# Altium PCB dctr_v2.0.pcbDoc
Units mil, origin at the board's own origin, x right, y up, seen from the top; angles counter-clockwise.
Board outline 7322.83 x 1023.62 mil, 2 copper layers (Top Layer, Bottom Layer); 19 components, 20 nets, 83 pads, 18 vias.
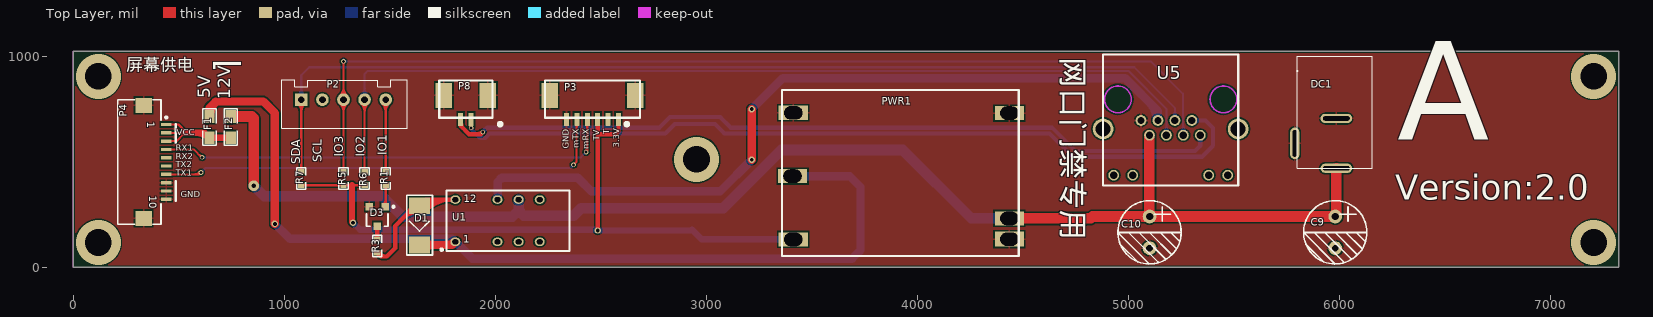
[diagram p0: Top Layer view]
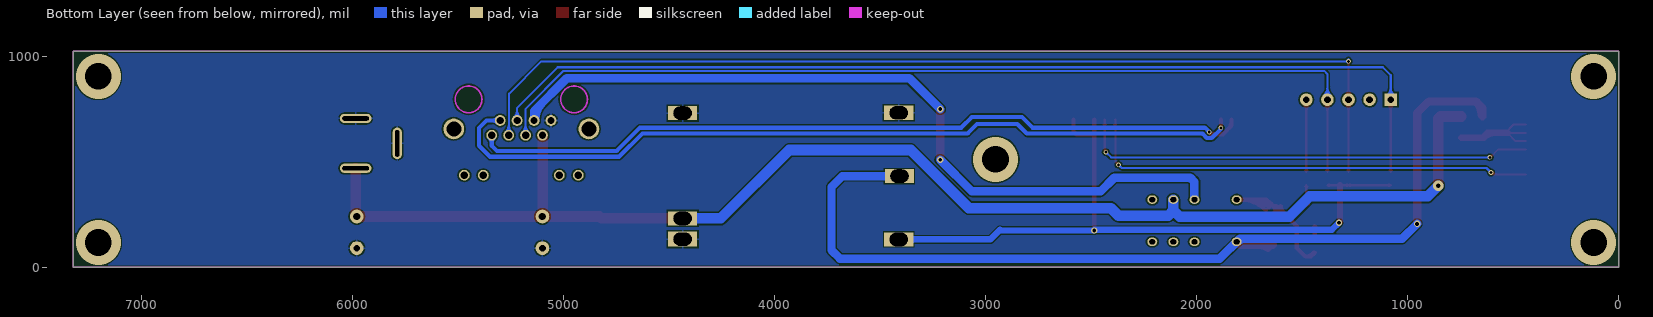
[diagram p1: Bottom Layer view, seen from below]

## Layer stack, top to bottom
Top Layer: signal copper 1.4
Dielectric: core 12.6, FR-4, Dk 4.8
Bottom Layer: signal copper 1.4

## Board outline
0,0 7322.83,0 7322.83,1023.62 0,1023.62

## Design rules (kind name [scope] priority, off if disabled: settings)
Clearance [All] p1: gap=7
ComponentClearance [All] p1: gap=0 collisioncheckmode=3 verticalgap=0 showdistances=FALSE
HoleSize [All] p1: absolutevalues=TRUE maxlimit=1000 minlimit=1 maxpercent=80.000 minpercent=20.000
HoleToHoleClearance [All] p1: gap=7 allowstackedmicrovias=TRUE
MinimumSolderMaskSliver [All] p1: minsoldermaskwidth=0
PolygonConnect [All] p1: connectstyle=Relief reliefconductorwidth=10 reliefentries=4 polygonreliefangle="90 Angle"
RoomDefinition IO [InComponentClass('IO')] p1: confinementstyle=ConfineIn formatcopy=TRUE lockcomponents=FALSE outline -12707.68,-5560.81 -10707.68,-5560.81 -10707.68,-4560.81 -12707.68,-4560.81
RoutingVias [All] p1: holewidth=14 width=22 viastyle="Through Hole" minholewidth=14 minwidth=22 maxholewidth=280 maxwidth=500
SilkToSilkClearance [All] p1: silktosilkclearance=0
SilkscreenOverComponentPads [All] p1: minsilkscreentomaskgap=0
SolderMaskExpansion [All] p1: expansion=4
TestPointUsage [All] p1: valid=0 allowmultiple=FALSE
Testpoint [All] p1: side=15 testpointundercomponent=TRUE minsize=40 maxsize=100 preferedsize=60 minholesize=0 maxholesize=40 preferedholesize=32 testpointgrid=1 style=1023 order=0123456789
Width [All] p1: maxlimit=100 minlimit=7 preferedwidth=7
18 further rules are at their usual default settings.

## Components (designator, comment, footprint, x,y, rotation, side; value= is the part's Value field where it differs from the comment)
C9 "220uF" RB.15/.3 5980,241.26 r90 top
C10 "220uF" RB.15/.3 5100,241.26 r90 top
D1 "D-S" DO-214AC(SMA) 1580,341.26 r270 top
D3 "AO3400A" SOT23A 1440,241.26 r180 top
DC1 "DC" DC005 5800,1001.26 r270 top
F1 "FUSE" 0805F 645,665.12 r270 top
F2 "FUSE" 0805F 745,665.12 r270 top
P2 "Header 5" XH2.54-5 1280,794.8 r0 top
P3 "Header 8" FPC/1.25T-6P 2460,701.26 r180 top
P4 "Header 12" FFC/SM1.0-2H10 440,500 r270 top
P8 "Header 4" FPC/1.25T-2P 1860,701.26 r180 top
PWR1 "PWR-1" PWR-1 4480,841.26 r180 top locked
R1 "10K" 0603R 1480,421.26 r90 top
R3 "10K" 0603R 1440,101.26 r90 top
R5 "10K" 0603R 1280,421.26 r270 top
R6 "10K" 0603R 1380,421.26 r270 top
R7 "10K" 0603R 1080,421.26 r270 top
U1 "JDQ(G6S-2)" JDQ-G6S-2 2060,221.26 r0 top
U5 "RJ45-DTE" RJ45-2 5200,661.26 r0 top

## Footprints (in the part's own frame and the unit in brackets; to place one, negate y for a bottom-side part, rotate by r counter-clockwise, add the part's x,y. Pads: shape width x height; smd on the part's side, far side on the other; paste and mask are expansions set on the pad)
0603R [mil]
  rect 25x30 smd: 1(-32,0) 2(32,0)
  silkscreen extent -51,-22 51,22
0805F [mil]
  rect 60x49.21 smd: 1(-50,0) 2(50,0)
  silkscreen extent -87,-31 86,31
DC005 [mm] "9*13.5*10( 外径5.5mm 内径2.1mm)"
  oval 1.1x3.8 hole 0.5 slot 3.2 at 90 deg: 1(13.5,4.7) 2(7.5,4.7)
  oval 3.8x1.1 hole 0.5 slot 3.2 at 0 deg: 3(10.5,-0.3)
  silkscreen extent 0,0 13.5,9
DO-214AC(SMA) [mm]
  rect 2x2.5 smd: A(1.27,1.524) K(5.969,1.524)
  silkscreen extent 0,0 7.19,3.1
FFC/SM1.0-2H10 [mm] "Connector; FH12 Series; 6 Position; 1.0mm Spaced Bottom Eccentric Contact"
  rect 0.4x1.25 smd: 1(-4.5,0) 2(-3.5,0) 3(-2.5,0) 4(-1.5,0) 5(-0.5,0) 6(0.5,0) 7(1.5,0) 8(2.5,0) 9(3.5,0) 10(4.5,0)
  rect 1.8x2 smd: 11(-6.8,-2.725) 12(6.8,-2.725)
  silkscreen extent -7.5,-5.82 7.5,0.13
FPC/1.25T-2P [mm]
  rect 0.6x1.6 smd: 1(-0.625,0) 2(0.625,0)
  rect 2x3 smd: 3(-2.65,-2.9) 4(2.65,-2.9)
  silkscreen extent -4.28,-4.7 3.2,0.71
FPC/1.25T-6P [mm]
  rect 0.6x1.6 smd: 1(-3.125,0) 2(-1.875,0) 3(-0.625,0) 4(0.625,0) 5(1.875,0) 6(3.125,0)
  rect 2x3 smd: 7(-5.15,-2.9) 8(5.15,-2.9)
  silkscreen extent -5.7,-4.7 5.7,0.71
JDQ-G6S-2 [mm] "继电器（G6S-2） 5VDC"
  oval 1.2x1 hole 0.6 slot 0.7 at 0 deg: 1(-6.35,-2.54) 3(-1.27,-2.54) 4(1.27,-2.54) 5(3.81,-2.54) 8(3.81,2.54) 9(1.27,2.54) 10(-1.27,2.54) 12(-6.35,2.54)
  silkscreen extent -8.14,-3.65 7.4,3.65
PWR-1 [mm]
  rect 3.5x1.8 hole 1.6 slot 2.2 at 0 deg: 1(1.125,17.975)
  rect 3.5x1.7 hole 1.6 slot 2.2 at 0 deg: 2(1.125,15.475) 3(1.125,2.8) 4(27.141,2.76) 5(27.225,10.38) 6(27.141,18)
  silkscreen extent 0,0 28.5,20
RB.15/.3 [mil] "8x11x3.5mm"
  round 65 hole 35: 1(0,0)
  round 65 hole 32: 2(-150,0)
  silkscreen extent -225,-150 75,150
RJ45-2 [mm] "FC601-56S-LED"
  round 2.5 hole 1.8: 0(-8.13,-0.13) 0(8.13,-0.13)
  round 1.3 hole 0.89: 1(-3.57,0.89) 2(-2.55,-0.89) 3(-1.53,0.89) 4(-0.51,-0.89) 5(0.51,0.89) 6(1.53,-0.89) 7(2.55,0.89) 8(3.57,-0.89) 9(-6.86,-5.7) 10(-4.57,-5.7) 11(4.57,-5.7) 12(6.86,-5.7)
  Keep-Out Layer circle w0.203: c-6.35,3.43 r1.61
  Keep-Out Layer circle w0.203: c6.35,3.43 r1.61
  silkscreen extent -8.13,-6.92 8.13,8.83
SOT23A [mm] "SOT-23; 3 Leads; Body 3.0 x 2.5 mm, inc. leads (LxW max)"
  rect 0.9x0.95 smd: 1(-0.95,-1.175) 2(0.95,-1.175) 3(0,1.175)
  silkscreen extent -2.07,-1.3 1.3,1.18
XH2.54-5 [mil]
  rect 60x60 hole 32: 1(-200,0)
  round 60 hole 32: 2(-100,0) 3(0,0) 4(100,0) 5(200,0)
  silkscreen extent -292,-136 301,94

## Part data
C9 C10: library part CAP-E, "电解电容"
D1: "肖特基二极管"
D3: library part MOS-N, "NMOS"
DC1: library part DC00X, "圆形电源接口"
F1 F2: "CR-1812-050A60V"
P2: "Header, 5-Pin"
P3: "Header, 8-Pin"
P4: "Header, 12-Pin"
P8: "Header, 4-Pin"
R1 R3 R5 R6 R7: library part RES, "普通电阻"
U1: "继电器（G6S-2 5VDC）"
U5: "设备"

## Via types
v1: diameter 22, hole 14, Top Layer to Bottom Layer, tented both sides, 7 vias
v2: diameter 212.6, hole 125.98, Top Layer to Bottom Layer, 5 vias
v3: diameter 30, hole 18, Top Layer to Bottom Layer, tented both sides, 3 vias
v4: diameter 30, hole 18, Top Layer to Bottom Layer, 2 vias
v5: diameter 50, hole 22, Top Layer to Bottom Layer, tented both sides, 1 vias

## Nets (pads, with @x,y where several pads share a name; then routed paths per layer and width w, separated by ;. In a path a pad name is that pad's centre, name@x,y a point inside that pad or via, vN(x,y) a via of type N, cw(c..) or ccw(c..) an arc to the next point about the centre after c; other vN are vias at no path point)
BTN: P2.3 R5.1 U5.6 | length 5258.9
  Top Layer w10: P2.3@1262.32,777.12 cw(c1219.64,734.44) 1280,734.44 cw(c1340.36,734.44) P2.3@1297.68,777.12 ; P2.3@1262.32,812.48 ccw(c1219.64,855.15) 1280,855.15 ccw(c1340.36,855.15) P2.3@1297.68,812.48 ; P2.3@1269.39,784.19 cw(c1243.79,758.59) 1280,758.59 cw(c1316.21,758.59) P2.3@1290.61,784.19 ; P2.3@1269.39,805.41 ccw(c1243.79,831.01) 1280,831.01 ccw(c1316.21,831.01) P2.3@1290.61,805.41 ; R5.1@1274.7,458.56 ccw(c1261.89,471.37) 1280,471.37 ccw(c1298.11,471.37) R5.1@1285.3,458.56 ; v1@1275.76,972.02 cw(c1265.51,961.77) 1280,961.77 cw(c1294.49,961.77) v1@1284.24,972.02 ; R5.1 P2.3 v1(1280,976.26)
  Bottom Layer w10: v1(1280,976.26) 1280,986.26 1290,976.26 5105,976.26 5257.67,823.59 5257.67,628.79 U5.6 ; v1@1284.24,972.02 cw(c1294.49,961.77) 1294.49,976.26 cw(c1294.49,990.75) v1@1284.24,980.5 ; U5.6@5245.68,640.78 ccw(c5216.72,669.73) 5257.67,669.73 ; 5257.67,657.99 ccw(c5292,657.99) U5.6@5267.72,633.71 ; 5257.67,682.13 ccw(c5316.14,682.13) U5.6@5274.8,640.78
D3V3: P3.1 P3.3 PWR1.6 R5.2 R6.2 R7.2 | length 3464.7
  Top Layer w10: R7.2 R5.2 1320,389.26 R6.2 ; R7.2@1087.8,383.96 cw(c1100.61,371.15) 1100.61,389.26 cw(c1100.61,407.37) R7.2@1087.8,394.56 ; R5.2@1272.2,383.96 ccw(c1259.39,371.15) 1259.39,389.26 ccw(c1259.39,407.37) R5.2@1272.2,394.56 ; R5.2@1287.8,383.96 cw(c1300.61,371.15) 1300.61,389.26 cw(c1300.61,407.37) R5.2@1287.8,394.56 ; R6.2@1372.2,383.96 ccw(c1359.39,371.15) 1359.39,389.26 ccw(c1359.39,407.37) R6.2@1372.2,394.56
  Top Layer w20: v4@2484.61,175.39 2484.61,631.26 ; P3.3 2484.61,631.26 ; P3.1 2583.03,644.29 2570,631.26 2484.61,631.26
  Top Layer w30: v3@1320,216.26 1320,389.26
  Bottom Layer w20: 2928.83,175 2931.47,177.64
  Bottom Layer w30: v3(1325,211.26) 1358.62,177.64 2485,177.64 2487.64,175 2928.83,175 ; 2931.47,177.64 2976.51,132.6 PWR1.6 ; PWR1.6@3362.98,119.54 ccw(c3331.46,88.02) 3331.46,132.6 ccw(c3331.46,177.18) PWR1.6@3362.98,145.65
  other v4: 2485,175
D5V: D1.K F1.1 PWR1.5 U1.1 | length 4814
  Top Layer w40: F1.1 645,756.26 675,786.26 ; F1.1@649.6,720.73 cw(c736.53,724.72) 675,786.26 ; v3(955,206.26) 955,731.26 900,786.26 675,786.26 ; D1.K 1795,106.26 U1.1 ; D1.K@1663.54,92.56 cw(c1696.61,59.5) 1696.61,106.26 cw(c1696.61,153.02) D1.K@1663.54,119.96 ; 1770.61,106.26 ccw(c1770.61,156.71) U1.1@1806.29,121.04
  Bottom Layer w40: v3(955,206.26) 1025.62,135.64 1795.62,135.64 1890,41.26 3690,41.26 3730,81.26 3730,381.26 3678.66,432.6 PWR1.5 ; 1772.11,135.64 cw(c1772.11,87.31) U1.1@1806.29,121.48
D12V: C9.1 C10.1 DC1.1 F2.1 PWR1.2 U1.9 U5.2 | length 6575.5
  Top Layer w50: F2.1 846.14,715.12 855,706.26 v5(855,386.26) ; PWR1.2 4820.75,232.01 4830,241.26 C10.1 C9.1 5985.04,246.3 DC1.1 ; C10.1@5099.61,241.65 U5.2
  Bottom Layer w50: v5(855,386.26) 905,336.26 1463.74,336.26 1560,240 2080,240 2110,270 ; U1.9 2110,270 ; PWR1.2 4254.25,232.01 3930,556.26 3355,556.26 3080,281.26 2406.26,281.26 2370,245 2135,245 2110,270
FEED1: P2.4 R6.1 U5.4 | length 4878.7
  Top Layer w10: P2.4@1362.32,777.12 cw(c1319.64,734.44) 1380,734.44 cw(c1440.36,734.44) P2.4@1397.68,777.12 ; P2.4@1369.39,784.19 cw(c1343.79,758.59) 1380,758.59 cw(c1416.21,758.59) P2.4@1390.61,784.19 ; R6.1@1374.7,458.56 ccw(c1361.89,471.37) 1380,471.37 ccw(c1398.11,471.37) R6.1@1385.3,458.56 ; R6.1 P2.4
  Bottom Layer w10: P2.4@1362.32,812.48 ccw(c1319.64,855.15) 1380,855.15 ccw(c1440.36,855.15) P2.4@1397.68,812.48 ; P2.4@1369.39,805.41 ccw(c1343.79,831.01) 1380,831.01 ccw(c1416.21,831.01) P2.4@1390.61,805.41 ; P2.4 1380,916.26 1395,931.26 5000,931.26 5179.92,751.34 U5.4 ; U5.4@5165.36,640.78 ccw(c5130.21,675.93) 5179.92,675.93 ccw(c5229.63,675.93) U5.4@5194.48,640.78
FEED2: P2.1 R7.1 U5.5 | length 5162.8
  Top Layer w10: P2.1@1062.32,777.12 cw(c1019.64,734.44) 1080,734.44 cw(c1140.36,734.44) P2.1@1097.68,777.12 ; P2.1@1069.39,784.19 cw(c1043.79,758.59) 1080,758.59 cw(c1116.21,758.59) P2.1@1090.61,784.19 ; R7.1@1074.7,458.56 ccw(c1061.89,471.37) 1080,471.37 ccw(c1098.11,471.37) R7.1@1085.3,458.56 ; R7.1 P2.1
  Bottom Layer w10: P2.1@1062.32,812.48 ccw(c1019.64,855.15) 1080,855.15 ccw(c1140.36,855.15) P2.1@1097.68,812.48 ; P2.1@1069.39,805.41 ccw(c1043.79,831.01) 1080,831.01 ccw(c1116.21,831.01) P2.1@1090.61,805.41 ; P2.1 1080,911.26 1117,948.26 5028,948.26 5220.08,756.18 U5.5 ; U5.5@5205.52,710.86 ccw(c5170.37,746.01) 5220.08,746.01 ccw(c5269.79,746.01) U5.5@5234.64,710.86
GND: C9.2 C10.2 D3.2 DC1.2 DC1.3 P3.6 P3.7 P3.8 P4.8 P4.9 P4.10 P4.11 P4.12 P8.3 P8.4 PWR1.1 PWR1.3 PWR1.4 U5.1
IO1: P2.5 R1.2 | length 521.7
  Top Layer w10: P2.5@1462.32,777.12 cw(c1419.64,734.44) 1480,734.44 cw(c1540.36,734.44) P2.5@1497.68,777.12 ; P2.5@1469.39,784.19 cw(c1443.79,758.59) 1480,758.59 cw(c1516.21,758.59) P2.5@1490.61,784.19 ; R1.2@1474.7,458.56 ccw(c1461.89,471.37) 1480,471.37 ccw(c1498.11,471.37) R1.2@1485.3,458.56 ; R1.2 P2.5
LOCK_V+: U1.10 U5.3 | length 3816.2
  Top Layer w40: v4(3215,510) v3(3215,750)
  Bottom Layer w40: U1.10 2010,405 2030,425 2390,425 2455,360 3065,360 v4(3215,510) ; v3(3215,750) 3361.26,896.26 4984.67,896.26 5139.76,741.17 U5.3 ; 5098.49,782.44 cw(c5012.35,696.3) U5.3@5134.17,696.3
NetD1_A: D1.A R3.1 U1.12 | length 1077.1
  Top Layer w20: R3.1 1458,51.26 1485,51.26 ; R3.1@1444.46,70.82 ccw(c1485,103.06) 1485,51.26 ; 1562.68,233.94 cw(c1630.16,166.46) D1.A@1630.16,261.89 ; 1587.2,258.46 ccw(c1554.4,291.26) D1.A@1600.79,291.26 ; D1.A@1596.82,268.08 cw(c1630.16,234.75) D1.A@1630.16,281.89 ; D1.A@1642.33,298.78 cw(c1696.61,244.5) 1696.61,321.26 ; D1.A@1656.47,284.63 cw(c1744.89,196.21) 1744.89,321.26 ; D1.A@1670.61,270.49 cw(c1793.17,147.93) U1.12@1793.17,321.26 ; U1.12@1799.21,314.41 ccw(c1782.68,297.88) 1782.68,321.26 ccw(c1782.68,344.64) U1.12@1799.21,328.11 ; U1.12 1670,321.26 D1.A 1620,291.26 1525,196.26 1525,91.26 1485,51.26
NetD3_1: D3.1 R1.1 | length 175.8
  Top Layer w10: D3.1@1468.41,297.5 ccw(c1440.43,325.48) 1480,325.48 ; R1.1@1474.7,383.96 cw(c1461.89,371.15) 1480,371.15 cw(c1498.11,371.15) R1.1@1485.3,383.96 ; D3.1@1480,290.12 R1.1 ; 1480,312.93 ccw(c1501.83,312.93) D3.1@1486.39,297.5
NetD3_3: D3.3 R3.2 | length 91
  Top Layer w20: D3.3@1434.54,188.56 cw(c1421.37,175.39) 1440,175.39 cw(c1458.63,175.39) D3.3@1445.46,188.56 ; R3.2 D3.3
NetF1_2: F1.2 F2.2 P4.1 P4.2 P4.3 | length 603.9
  Top Layer w10: P4.3 488.43,598.43 525.6,635.6 525.6,637.8 ; P4.2 525.6,637.8 ; P4.1 497.83,677.17 531.4,643.6 ; 537.2,637.8 531.4,643.6 ; 525.6,637.8 531.4,643.6
  Top Layer w30: 525.6,637.8 537.2,637.8 622.33,637.8 F1.2 F2.2 ; 580.09,637.8 cw(c580.09,555.6) F1.2@638.21,613.72
RX1: P3.4 P4.4 | length 2294
  Top Layer w10: P4.4 570.31,559.06 609.06,520.31 v1(610,521.26) ; 596.53,532.84 ccw(c610,546.31) v1@610,527.26 ; 601.09,528.28 cw(c594.08,521.26) v1@604,521.26 ; v1@2425.76,550.5 ccw(c2402.49,573.77) 2435.39,573.77 ; v1(2430,546.26) 2435.39,551.65 P3.4 ; P3.4@2430.58,676.76 cw(c2418.95,665.13) 2435.39,665.13 cw(c2451.84,665.13) P3.4@2440.21,676.76
  Bottom Layer w10: v1(610,521.26) 2405,521.26 v1(2430,546.26) ; v1@614.24,517.02 cw(c624.49,506.77) 624.49,521.26 cw(c624.49,535.75) v1@614.24,525.5 ; v1@2424,546.26 cw(c2409.51,546.26) 2419.76,536.02 cw(c2430,525.77) v1@2430,540.26
RX2: P4.5
SCL: P2.2
SPEAKERA: P8.1 U5.7 | length 3950.6
  Top Layer w20: P8.1 1884.61,661.46 1884.81,661.26 v1(1885,661.26)
  Bottom Layer w20: v1(1885,661.26) 1885,656.66 1928.4,613.26 1951.6,613.26 1968,629.66 1968,631.08 1972.03,635.11 2805.11,635.11 2850,680 3040,680 3084.89,635.11 4626.15,635.11 4737,524.26 5348,524.26 5400,576.26 5400,661.26 5364.96,696.3 U5.7 ; U5.7@5311.42,685.28 cw(c5338.03,658.66) 5338.03,696.3 cw(c5338.03,733.94) U5.7@5311.42,707.32
SPEAKERB: P8.2 U5.8 | length 3822.4
  Top Layer w20: P8.2@1835,700.87 1835,671.65 1875.39,631.26 1930,631.26 v1(1940,641.26) ; P8.2@1837.2,681.57 ccw(c1866.49,681.57) 1845.78,660.87 ; 1913.44,631.26 ccw(c1913.44,667.82) v1@1939.29,641.97
  Bottom Layer w20: v1(1940,641.26) 1960.85,662.11 2777.11,662.11 2827.11,712.11 3065,712.11 3115,662.11 4637.33,662.11 4748.18,551.26 5315,551.26 5340.55,576.81 U5.8 ; U5.8@5329.53,615.2 cw(c5302.91,588.58) 5340.55,588.58 cw(c5378.19,588.58) U5.8@5351.58,615.2
TX1: P3.5 P4.7 | length 2316.9
  Top Layer w10: P4.7 595.94,440.94 v1(605,450) ; 568.65,440.94 ccw(c568.65,486.35) v1@600.76,454.24 ; 592.8,440.94 ccw(c592.8,462.2) v1@607.83,447.17 ; v1(2370,486.26) 2385,501.26 2385,700.08 P3.5 ; v1@2370,492.26 ccw(c2370,506.75) 2380.24,496.5 ccw(c2390.49,486.26) v1@2376,486.26 ; P3.5@2381.36,676.76 cw(c2372.59,667.98) 2385,667.98 ; 2385,662.28 cw(c2405.48,662.28) P3.5@2391,676.76
  Bottom Layer w10: v1(605,450) 626.26,471.26 2355,471.26 v1(2370,486.26) ; v1@605,456 ccw(c605,470.49) 615.24,460.24 ccw(c625.49,450) v1@611,450 ; v1@2364,486.26 cw(c2349.51,486.26) 2359.76,476.02 cw(c2370,465.77) v1@2370,480.26
TX2: P4.6
pads on no net: P3.2 U1.3 U1.4 U1.5 U1.8 U5.0 U5.9 U5.10 U5.11 U5.12
copper on no net:
  other v2: 118.11,118.11 7204.72,118.11 2952.76,511.81 118.11,905.51 7204.72,905.51

## Polygon pours and split planes (outlines as drawn)
GND on Top Layer "Keep-Out Layer-No Net" (solid, remove dead copper, pour order 1000): 0,1023.62 0,0 7322.83,0 7322.83,1023.62
GND on Bottom Layer "Keep-Out Layer-No Net" (solid, remove dead copper, pour order 1001): 0,0 0,1023.62 7322.83,1023.62 7322.83,0

## Keep-outs
Keep-Out Layer:
  the board outline again, w5

## Silkscreen, mask and mechanical layers (free items; w line width, h text height)
Top Overlay:
  lines w10: 485,315 485,410 ; 485,590 485,680
  text "网口门禁专用" at 4650,995 h180 r270
  text "[" at 645,986.26 h200 r270
  text "屏幕供电" at 250,911.26 h100
  text "5V" at 670,801.26 h100 r90
  text "12V" at 765,796.26 h100 r90
  text "T" at 2550.75,630.65 h50 r90
  text "VCC" at 490,615 h50
  text "TV" at 2502.75,600.25 h50 r90
  text "3.3V" at 2598.21,566.19 h50 r90
  text "mTX" at 2406.75,564.72 h50 r90
  text "GND" at 2358.21,561.35 h50 r90
  text "mRX" at 2454.75,559.74 h50 r90
  text "RX1" at 485,541.26 h50
  text "IO1" at 1498.21,532.07 h70 r90
  text "IO2" at 1395.71,523.87 h70 r90
  text "IO3" at 1293.21,523.46 h70 r90
  text "RX2" at 485,501.45 h50
  text "SCL" at 1190.71,498.94 h70 r90
  text "SDA" at 1088.21,489.72 h70 r90
  text "TX2" at 485,461.65 h50
  text "A" at 6275,450 h800
  text "TX1" at 485,421.84 h50
  text "GND" at 508.86,321.26 h50
  text "Version:2.0" at 6265,280 h200

## Text inside footprints (layer, text, board x,y; h text height)
P4: Top Overlay "1" at 337.31,690.01 h59.06 r270; Top Overlay "10" at 346.5,338.58 h59.06 r270
U1: Top Overlay "1" at 1847,104.26 h60; Top Overlay "12" at 1850,297.26 h60